# Altium PCB ad7606.PcbDoc
Units mil, origin at the board's own origin, x right, y up, seen from the top; angles counter-clockwise.
Board outline 2465 x 1865 mil, 2 copper layers (Top Layer, Bottom Layer); 26 components, 49 nets, 158 pads, 96 vias.
Unrouted connection lines stored in the file: 11.
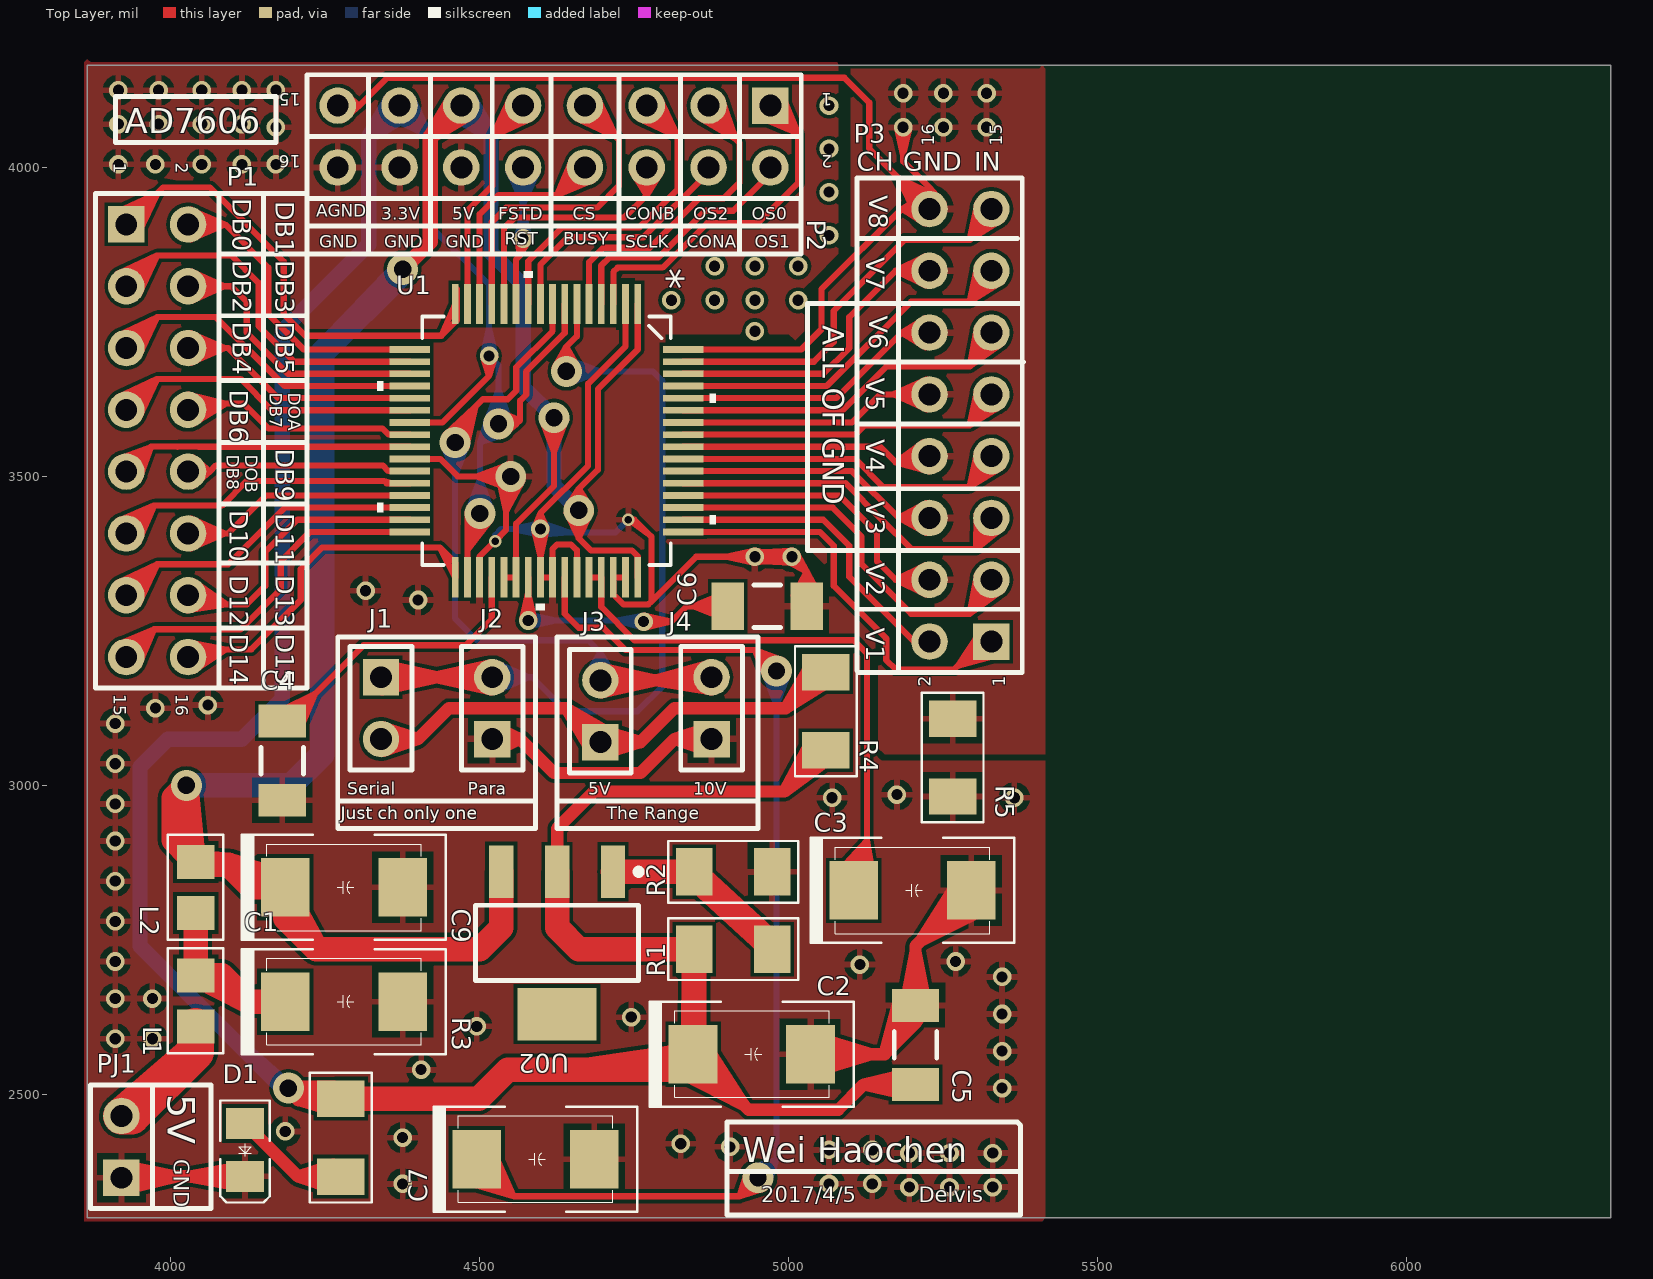
[diagram p0: Top Layer view]
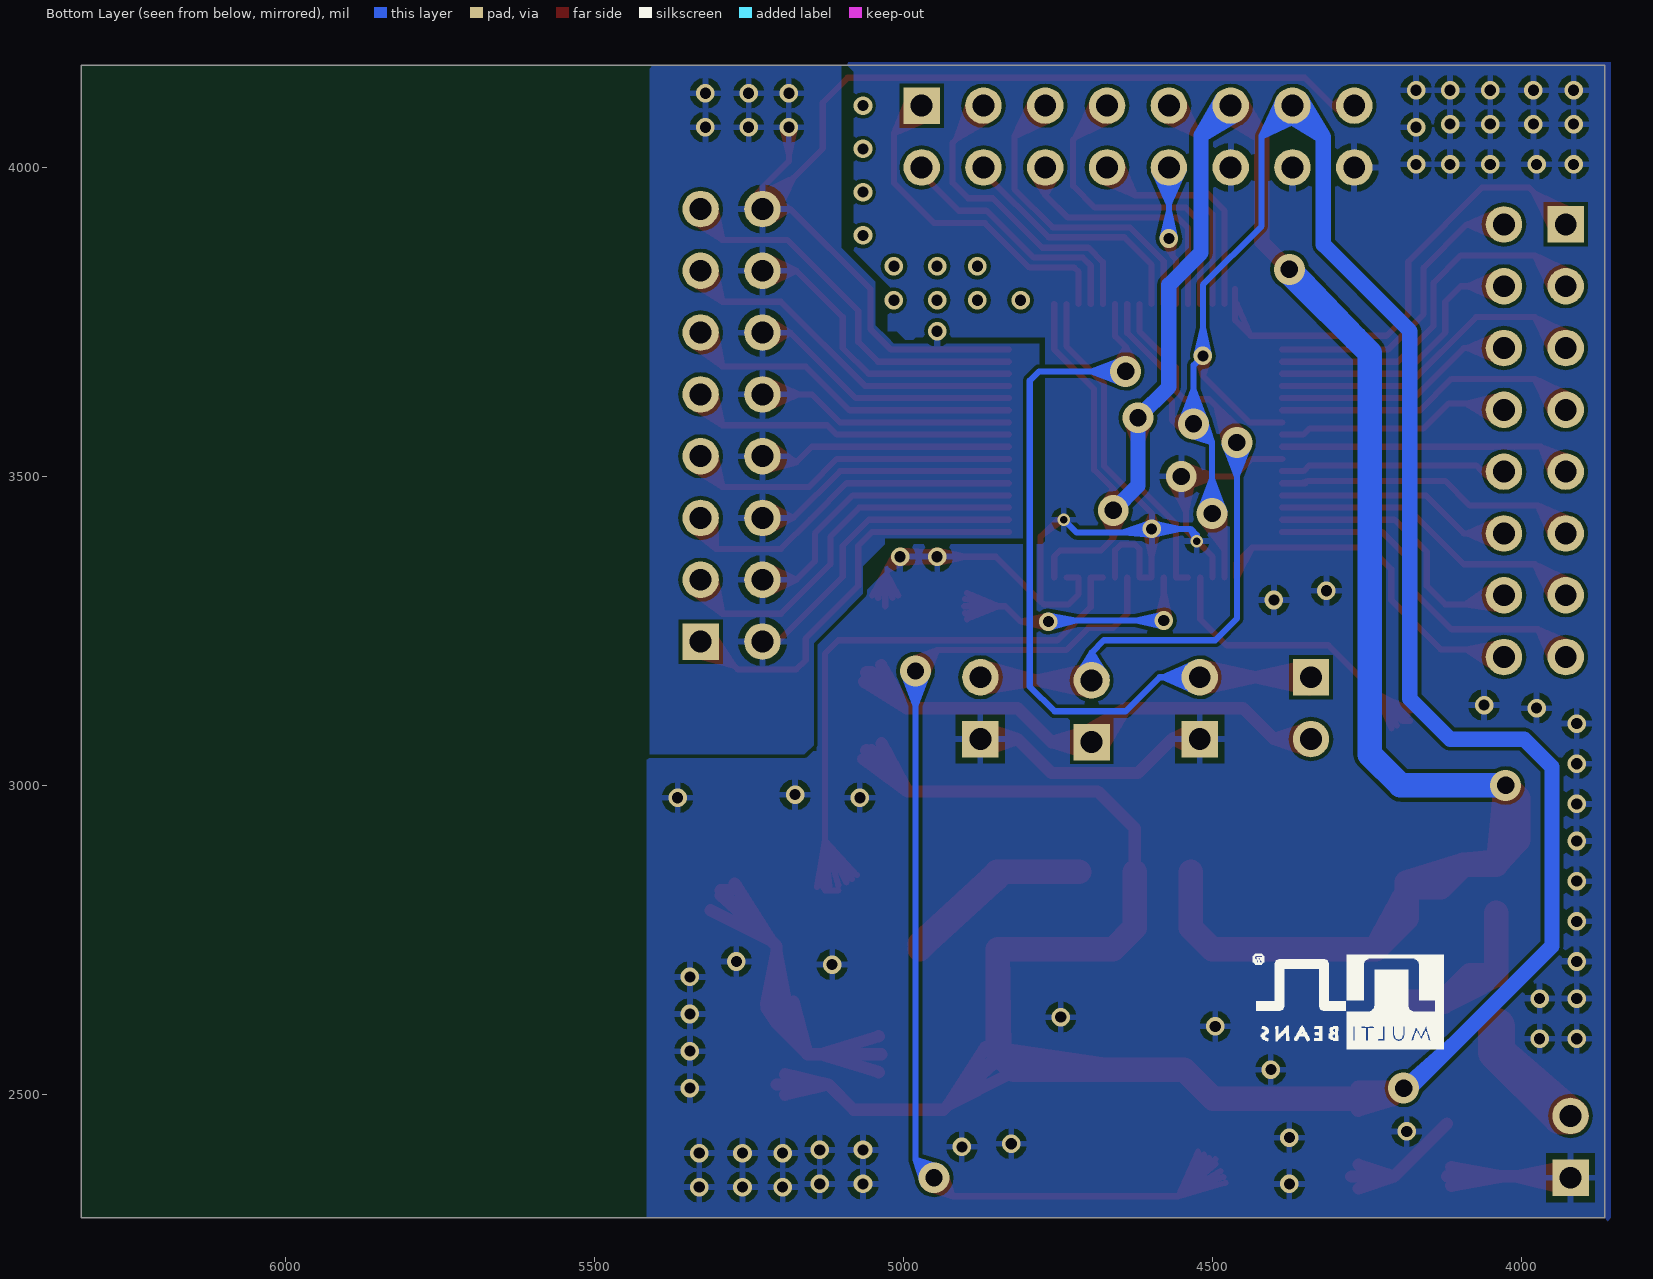
[diagram p1: Bottom Layer view, seen from below]

## Layer stack, top to bottom
Top Layer: signal copper 1.4
Dielectric: dielectric 12.6, FR-4, Dk 4.8
Bottom Layer: signal copper 1.4

## Board outline
3865,4165 3865,2300 6330,2300 6330,4165 3865,4165

## Design rules (kind name [scope] priority, off if disabled: settings)
Clearance [All] p1: gap=6
HoleToHoleClearance [All] p1: gap=6 allowstackedmicrovias=TRUE
PolygonConnect [All] p1: connectstyle=Relief reliefconductorwidth=10 reliefentries=4 polygonreliefangle="90 Angle" airgapwidth=10
RoutingVias [All] p1: holewidth=10 width=20 viastyle="Through Hole" minholewidth=10 minwidth=18 maxholewidth=28 maxwidth=60
SilkToSilkClearance [All] p1: silktosilkclearance=1
SilkToSolderMaskClearance [IsPad] p1: minsilkscreentomaskgap=1 clearancetoexposedcopper=TRUE
SolderMaskExpansion [All] p1: expansion=6
Width [All] p1: maxlimit=80 minlimit=6 preferedwidth=20 toplayer_prefwidth=10 minimp=50.000000 maximp=50.000000 favimp=50.000000
25 further rules are at their usual default settings.

## Components (designator, comment, footprint, x,y, rotation, side; value= is the part's Value field where it differs from the comment)
C1 "Cap Pol1" TCAP_SMD_2312_6032-28_C_M 4280,2650 r0 top
C2 "Cap Pol1" TCAP_SMD_2312_6032-28_C_M 4940,2565 r0 top
C3 "Cap Pol1" TCAP_SMD_2312_6032-28_C_M 5200,2830 r0 top
C4 "Cap" CAP_SMD_1206_3216_M 4180,3040 r270 top
C5 "Cap" CAP_SMD_1206_3216_M 5205,2580 r90 top
C6 "Cap" CAP_SMD_1206_3216_M 4965,3290 r0 top
C7 "Cap Pol1" TCAP_SMD_2312_6032-28_C_M 4590,2395 r0 top
C9 "Cap Pol1" TCAP_SMD_2312_6032-28_C_M 4280,2835 r0 top
D1 "LED0" LED_SMD_0805_2012_M 4120,2410 r90 top
J1 "head2" HDR1X2 4340,3175 r270 top
J2 "head2" HDR1X2 4520,3075 r90 top
J3 "head2" HDR1X2 4695,3070 r90 top
J4 "head2" HDR1X2 4875,3075 r90 top
L1 "Inductor" RES_SMD_0805_2012_M 4040,2651.34 r90 top
L2 "Inductor" RES_SMD_0805_2012_M 4040,2835 r90 top
P1 "MHDR2X8" HDR2X8 3927.74,3907.74 r270 top
P2 "MHDR2X8" HDR2X8 4970,4100 r180 top
P3 "MHDR2X8" HDR2X8 5327.74,3232.74 r90 top
PJ1 "head2" HDR1X2 3920,2365 r90 top
R1 "Res2" RES_SMD_1206_3216_M 4910,2735 r180 top
R2 "Res2" RES_SMD_1206_3216_M 4910,2860 r180 top
R3 "Res2" RES_SMD_1206_3216_M 4275,2430 r270 top
R4 "Res2" RES_SMD_1206_3216_M 5060,3120 r270 top
R5 "Res2" RES_SMD_1206_3216_M 5265,3045 r90 top
U1 "AD7606" AD7606 4607.74,3557.74 r270 top locked
U02 "AMS1117" SOT230P700X180-4N 4625,2745 r270 top

## Footprints (in the part's own frame and the unit in brackets; to place one, negate y for a bottom-side part, rotate by r counter-clockwise, add the part's x,y. Pads: shape width x height; smd on the part's side, far side on the other; paste and mask are expansions set on the pad)
AD7606 [mil]
  rect 65.5x11 smd: 1(-221.25,147.64) 2(-221.25,127.95) 3(-221.25,108.27) 4(-221.25,88.58) 5(-221.25,68.9) 6(-221.25,49.21) 7(-221.25,29.53) 8(-221.25,9.84) 9(-221.25,-9.84) 10(-221.25,-29.53) 11(-221.25,-49.21) 12(-221.25,-68.9) 13(-221.25,-88.58) 14(-221.25,-108.27) 15(-221.25,-127.95) 16(-221.25,-147.64) 33(221.25,-147.64) 34(221.25,-127.95) 35(221.25,-108.27) 36(221.25,-88.58) 37(221.25,-68.9) 38(221.25,-49.21) 39(221.25,-29.53) 40(221.25,-9.84) 41(221.25,9.84) 42(221.25,29.53) 43(221.25,49.21) 44(221.25,68.9) 45(221.25,88.58) 46(221.25,108.27) 47(221.25,127.95) 48(221.25,147.64)
  rect 11x65.5 smd: 17(-147.64,-221.25) 18(-127.95,-221.25) 19(-108.27,-221.25) 20(-88.58,-221.25) 21(-68.9,-221.25) 22(-49.21,-221.25) 23(-29.53,-221.25) 24(-9.84,-221.25) 25(9.84,-221.25) 26(29.53,-221.25) 27(49.21,-221.25) 28(68.9,-221.25) 29(88.58,-221.25) 30(108.27,-221.25) 31(127.95,-221.25) 32(147.64,-221.25) 49(147.64,221.25) 50(127.95,221.25) 51(108.27,221.25) 52(88.58,221.25) 53(68.9,221.25) 54(49.21,221.25) 55(29.53,221.25) 56(9.84,221.25) 57(-9.84,221.25) 58(-29.53,221.25) 59(-49.21,221.25) 60(-68.9,221.25) 61(-88.58,221.25) 62(-108.27,221.25) 63(-127.95,221.25) 64(-147.64,221.25)
  silkscreen extent -274,-274 274,274
CAP_SMD_1206_3216_M [mm] "Chip Capacitor, 2-Leads, Body 3.30x1.70mm, IPC Low Density"
  rect 1.35x1.95 smd: 1(-1.625,0) 2(1.625,0)
  silkscreen extent -0.55,-0.87 0.55,0.87, body extent -1.7,-0.9 1.7,0.9, height 0.8
HDR1X2 [mm] "Connector; Header; 2 Position"
  rect 1.5x1.5 hole 0.9: 1(0,0)
  round 1.5 hole 0.9: 2(2.54,0)
  silkscreen extent -1.27,-1.27 3.81,1.27
HDR2X8 [mm] "Connector; Header; 8x2 Position"
  rect 1.5x1.5 hole 0.9: 1(0,0)
  round 1.5 hole 0.9: 2(0,2.54) 3(2.54,0) 4(2.54,2.54) 5(5.08,0) 6(5.08,2.54) 7(7.62,0) 8(7.62,2.54) 9(10.16,0) 10(10.16,2.54) 11(12.7,0) 12(12.7,2.54) 13(15.24,0) 14(15.24,2.54) 15(17.78,0) 16(17.78,2.54)
  silkscreen extent -1.27,-1.27 19.05,3.81
LED_SMD_0805_2012_M [mm] "LED 2-Leads, Body 2.00x1.35mm, IPC Low Density"
  rect 1.28x1.57 smd: 1(1.085,0) 2(-1.085,0)
  silkscreen extent -2.16,-1.02 2.03,1.02, body extent -1.1,-0.72 1.1,0.72, height 0.8
RES_SMD_0805_2012_M [mm] "Chip Resistor, 2-Leads, Body 2.10x1.37mm, IPC Low Density"
  rect 1.4x1.55 smd: 1(-1.05,0) 2(1.05,0)
  silkscreen extent -2.16,-1.14 2.16,1.14, body extent -1.1,-0.73 1.1,0.73, height 0.8
RES_SMD_1206_3216_M [mm] "Chip Resistor, 2-Leads, Body 3.30x1.70mm, IPC Low Density"
  rect 1.5x1.95 smd: 1(-1.6,0) 2(1.6,0)
  silkscreen extent -2.67,-1.27 2.67,1.27, body extent -1.7,-0.9 1.7,0.9, height 1.4
SOT230P700X180-4N [mm] "SOT223, 4-Leads, Body 6.50x7.00mm (avg), Pitch 2.30mm, IPC Medium Density"
  rect 2.15x1 smd: 1(-2.925,2.3) 2(-2.925,0) 3(-2.925,-2.3)
  rect 2.15x3.25 smd: 4(2.925,0)
  silkscreen extent -3.05,-3.35 1.55,3.48, body extent -1.85,-3.35 1.85,3.35, height 1.8
TCAP_SMD_2312_6032-28_C_M [mm] "Chip Capacitor, 2-Leads, Body 6.00x3.20mm, IPC Low Density"
  rect 2x2.4 smd: 1(-2.413,0) 2(2.413,0)
  silkscreen extent -4.19,-2.16 4.19,2.16, body extent -3.1,-1.7 3.1,1.7, height 2.8

## Part data
C1 C2 C3 C7 C9: "Polarized Capacitor (Radial)"
C4 C5 C6: "Capacitor"
D1: "Typical INFRARED GaAs LED"
P1 P2 P3: "Header, 8-Pin, Dual row"
R1 R2 R3 R4 R5: "Resistor"

## Via types
v1: diameter 30, hole 18, Top Layer to Bottom Layer, 82 vias
v2: diameter 50, hole 28, Top Layer to Bottom Layer, 12 vias
v3: diameter 20, hole 12, Top Layer to Bottom Layer, 2 vias

## Nets (pads, with @x,y where several pads share a name; then routed paths per layer and width w, separated by ;. In a path a pad name is that pad's centre, name@x,y a point inside that pad or via, vN(x,y) a via of type N, cw(c..) or ccw(c..) an arc to the next point about the centre after c; other vN are vias at no path point)
3.3V: C2.1 C5.1 P2.13 R1.2 R3.1 R4.2 U1.7 U1.23 U1.34 U02.2 | length 10003.9
  Top Layer w10: U1.23 4439.64,3587.26 ; U1.23@4413.74,3587.26 4439.64,3587.26 ; U1.34 4479.78,3419.78 v2(4500,3440) 4479.78,3380.67 ; U1.34@4479.78,3363.74 4479.78,3399.24 ; v2@4480.28,3443.35 4479.78,3380.67 ; v2@4490.31,3442.46 4479.78,3380.67 ; v1@4505.12,3693.46 4515,3662.63 ; v2@4509.18,3436.03 4479.78,3380.67 ; v1(4515,3695) 4515,3662.63 ; v2@4517.66,3430.61 4479.78,3380.67 ; v1@4524.88,3693.46 4515,3662.63 ; v2@4529.74,3595 4565,3590.91 ; v2@4532.36,3604.86 4565,3590.91 ; v2@4533.04,3575.47 4565,3590.91 ; v2@4538.75,3567.02 4565,3590.91 ; U1.7@4637.26,3751.74 4637.26,3732.26 ; U1.7 4637.26,3732.26 ; 4439.64,3587.26 4515,3662.63 ; v2(4530,3585) 4559.09,3585 ; v2(4530,3585) 4565,3590.91 ; v2(4530,3585) 4559.09,3585 ; 4559.09,3585 4531.72,3575.15 4559.09,3585 ; 4559.09,3585 4531.72,3594.85 4559.09,3585 ; 4559.09,3585 4536.88,3566.22 4559.09,3585 ; 4559.09,3585 4536.88,3603.78 4559.09,3585 ; 4559.09,3585 4565,3590.91 ; 4565,3590.91 4565,3622.37 4575,3632.37 4575,3670 4637.26,3732.26
  Top Layer w20: U02.2 4625,2930 ; U02.2@4625,2882.8 4625,2930 ; C2.1@4828.39,2532.91 4926.8,2483.2 ; C2.1@4845,2557.13 4926.8,2483.2 ; C2.1 4935,2475 5080,2475 5121.02,2516.02 ; C2.1@4867.42,2576.1 4926.8,2483.2 ; R4.2@5035.07,3068.11 4992.99,2990 ; R4.2@5051.14,3057.01 4992.99,2990 ; R4.2 4992.99,2990 ; R4.2@5064.39,3042.66 4992.99,2990 ; C5.1@5191.29,2499.56 5121.02,2516.02 ; C5.1@5191.29,2532.49 5121.02,2516.02 ; C5.1@5193.19,2516.02 5121.02,2516.02 ; C5.1 5121.02,2516.02 ; 4625,2930 4685,2990 4992.99,2990
  Top Layer w25: v2(4190,2510) 4263.69,2476.14 v2@4207.01,2492.99 ; v2(4190,2510) 4266.14,2492.99 v2@4207.01,2492.99 ; v2(4190,2510) 4263.69,2509.84 v2@4207.01,2492.99 ; v2(4190,2510) R3.1 v2@4207.01,2492.99 ; v2(4190,2510) v2@4207.01,2492.99
  Top Layer w40: R3.1 4497.99,2492.99 4545,2540 4820,2540 C2.1 ; R3.1@4283.86,2492.99 4433.39,2492.99 ; U02.2@4625,2837.52 4625,2770 ; U02.2 4625,2770 ; 4673.96,2540 C2.1 ; 4697.48,2735 R1.2 ; C2.1@4847.01,2576.61 4847.01,2726.14 4845,2572.87 R1.2@4847.01,2732.27 ; 4625,2770 4660,2735 R1.2 ; C2.1 4847.01,2567.01 R1.2
  Bottom Layer w10: P2.13@4355.93,4079.91 4420,4050 ; P2.13@4360.84,4088.73 4420,4050 ; P2.13 4420,4050 ; P2.13@4381.27,4109.16 4420,4050 ; P2.13@4390.09,4114.07 4420,4050 ; v2@4480.33,3443.64 4500,3495 ; v2@4490.04,3440.91 4500,3495 ; v2(4500,3440) 4500,3555 ; v1@4505.06,3696.11 4515,3740 v1@4524.94,3696.11 ; v2@4509.96,3440.91 4500,3495 ; v2@4510.33,3588.64 4530,3640 ; v2@4512.92,3595.41 4500,3555 ; v2@4519.67,3443.64 4500,3495 ; v2@4520.04,3585.91 4530,3640 ; v2@4522.14,3591.19 4500,3555 ; v2@4536.19,3577.14 4500,3555 ; v2@4539.96,3585.91 4530,3640 ; v2@4540.41,3567.92 4500,3555 ; v2@4549.67,3588.64 4530,3640 ; 4420,4050 4420,3905 4515,3810 v1(4515,3695) 4530,3680 v2(4530,3585) ; 4500,3555 v2(4530,3585) ; 4500,3555 v2(4530,3585)
  Bottom Layer w25: 4106.98,2583.02 v2(4190,2510) 4180,2510 3950,2740 3950,3030 3995,3075 4115,3075 4180,3140 4180,3735 4320,3875 4320,4050 ; P2.13@4356.6,4110.5 4320,4050 ; P2.13@4380.5,4086.6 4320,4050 ; 4320,4050 P2.13 4320,4050
5V: C9.1 L2.2 P2.11 U1.1 U1.37 U1.38 U1.48 U02.3 | length 6008.9
  Top Layer w10: U1.38@4558.52,3363.74 4558.52,3399.24 ; v2@4600.33,3591.36 4620,3540 ; v2@4610.04,3594.09 4620,3540 ; v2(4620,3595) 4620,3485 4558.52,3423.52 U1.38 ; v2@4629.96,3594.09 4620,3540 ; v2@4639.67,3591.36 4620,3540 ; v2@4640.5,3440.56 4660,3400 ; v2@4640.85,3450.76 4660,3479.75 ; v2@4650.06,3443.89 4660,3400 ; v2@4650.1,3446.44 4660,3479.75 ; v2@4669.9,3446.44 4660,3479.75 ; v2@4669.94,3443.89 4660,3400 ; v2@4679.15,3450.76 4660,3479.75 ; v2@4679.5,3440.56 4660,3400 ; U1.48 4755.37,3370.61 ; 4755.37,3716.24 U1.1@4755.37,3751.74 ; U1.1 4755.37,3705.37 4691,3641 4691,3510.75 4660,3479.75 ; U1.38 U1.37 U1.38 ; 4660,3400 v2(4660,3445) ; 4660,3400 4679.76,3380.24 4745.75,3380.24 4755.37,3370.61 ; 4660,3400 v2(4660,3445) ; v2(4660,3445) 4660,3479.75 ; 4755.37,3370.61 4755.37,3363.74 4755.37,3370.61
  Top Layer w25: v2(4375,3835) 4420,3880 4420,4050 ; P2.11@4456.6,4110.5 4420,4050 ; P2.11@4480.5,4086.6 4420,4050 ; 4420,4050 P2.11 4420,4050
  Top Layer w40: L2.2@4040,2871.34 4093.66,2871.34 ; L2.2 4005,2911.34 ; L2.2@4042.95,2876.34 4093.66,2871.34 ; C9.1@4185,2842.87 4093.66,2871.34 ; U02.3@4534.45,2837.52 4534.45,2769.45 ; U02.3 4534.45,2769.45 ; 4005,2911.34 v2(4025,3000) ; 4005,2911.34 L2.2@4037.05,2876.34 ; 4005,2911.34 L2.2@4037.05,2876.34 ; 4005,2911.34 4005,2980 ; 4005,2980 L2.2@4037.05,2876.34 ; 4005,2980 v2(4025,3000) ; v2(4025,3000) L2.2@4037.05,2876.34 ; 4093.66,2871.34 4130,2835 ; 4130,2835 C9.1 ; 4130,2835 C9.1 ; 4185,2785 C9.1@4185,2827.13 ; 4185,2785 C9.1@4185,2827.13 ; 4185,2785 4235,2735 ; 4185,2785 C9.1 ; C9.1@4185,2827.13 4235,2735 ; 4235,2735 4500,2735 4534.45,2769.45
  Bottom Layer w25: P2.11@4459.56,4086.55 4518.03,4051.97 ; P2.11 4518.03,4051.97 ; P2.11@4483.45,4110.44 4518.03,4051.97 ; 4518.03,4051.97 4518.03,3861.97 4570,3810 4570,3645 ; 4570,3645 v2(4620,3595) ; 4570,3645 v2(4620,3595) ; 4620,3485 v2(4660,3445) 4620,3485 ; 4620,3485 v2(4620,3595)
  Bottom Layer w40: v2(4025,3000) 4195,3000 4245,3050 4245,3700 4375,3830 v2(4375,3835) 4268.02,3723.02
AGND: P2.15 P3.2 P3.4 P3.6 P3.8 P3.10 P3.12 P3.14 P3.16 R5.2 U1.50 U1.52 U1.54 U1.56 U1.58 U1.60 U1.62 U1.64 | length 7702.3
  Top Layer w10: P2.15 4305,4100 ; P2.15@4273.02,4085.79 4305,4100 ; P2.15@4273.02,4114.21 4305,4100 ; P2.15@4278.59,4077.03 4305,4100 ; P2.15@4278.59,4122.97 4305,4100 ; U1.50 5055.69,3429.78 5097.74,3387.74 5097.74,3337.74 5202.74,3232.74 P3.2 ; U1.52 5081.32,3469.15 5142.74,3407.74 5142.74,3362.74 5172.74,3332.74 ; U1.54 5101.95,3508.52 5177.74,3432.74 ; U1.56 5147.58,3547.89 5172.74,3522.74 ; U1.58 5102.26,3587.26 5147.74,3632.74 P3.10 5168.21,3632.74 ; U1.60 5076.63,3626.63 5182.74,3732.74 ; U1.62 5056,3666 5097.74,3707.74 5097.74,3757.74 5172.74,3832.74 ; U1.64 5020.37,3705.37 5052.74,3737.74 5052.74,3802.74 5182.74,3932.74 ; U1.50@4856.24,3429.78 4891.74,3429.78 ; U1.52@4856.24,3469.15 4891.74,3469.15 ; U1.54@4856.24,3508.52 4891.74,3508.52 ; U1.56@4856.24,3547.89 4891.74,3547.89 ; U1.58@4856.24,3587.26 4891.74,3587.26 ; U1.60@4856.24,3626.63 4891.74,3626.63 ; U1.62@4856.24,3666 4891.74,3666 ; U1.64@4856.24,3705.37 4891.74,3705.37 ; v1@5175.06,4063.89 5185,4020 v1@5194.94,4063.89 ; v1(5185,4065) 5185,4010 5227.74,3967.26 ; P3.16@5204.81,3941.45 5227.74,3967.26 ; P3.16@5207.68,3918.61 5177,3983.48 ; P3.16@5213.53,3935.79 5227.74,3967.26 ; P3.16@5216.48,3923.56 5177,3983.48 ; P3.8@5218.16,3555.32 5172.74,3522.74 ; P3.12@5221.05,3709.14 5182.74,3732.74 ; P3.12@5221.05,3756.34 5182.74,3732.74 ; P3.16@5221.05,3909.14 5182.74,3932.74 ; P3.16@5221.05,3956.34 5182.74,3932.74 ; P3.6@5221.72,3408.96 5177.74,3432.74 ; P3.6@5221.72,3456.51 5177.74,3432.74 ; P3.4@5222.27,3308.83 5172.74,3332.74 ; P3.4@5222.27,3356.65 5172.74,3332.74 ; P3.14@5222.27,3808.83 5172.74,3832.74 ; P3.14@5222.27,3856.65 5172.74,3832.74 ; P3.10@5222.68,3608.73 5168.21,3632.74 ; P3.10@5222.68,3656.74 5168.21,3632.74 ; P3.8@5223.3,3546.57 5172.74,3522.74 ; P3.12@5225.39,3718.4 5182.74,3732.74 ; P3.12@5225.39,3747.07 5182.74,3732.74 ; P3.16@5225.39,3918.4 5182.74,3932.74 ; P3.16@5225.39,3947.07 5182.74,3932.74 ; P3.6@5225.63,3418.36 5177.74,3432.74 ; P3.6@5225.63,3447.11 5177.74,3432.74 ; P3.4@5225.82,3318.34 5172.74,3332.74 ; P3.4@5225.82,3347.14 5172.74,3332.74 ; P3.14@5225.82,3818.34 5172.74,3832.74 ; P3.14@5225.82,3847.14 5172.74,3832.74 ; P3.10@5225.96,3618.32 5168.21,3632.74 ; P3.10@5225.96,3647.16 5168.21,3632.74 ; P3.8@5226.72,3508.23 5172.74,3522.74 ; P3.8@5228.46,3518.23 5172.74,3522.74 ; P3.16@5236.92,3944 5177,3983.48 ; P3.16@5241.86,3952.79 5177,3983.48 ; P3.16@5241.94,3935.79 5227.74,3967.26 ; P3.16@5250.66,3941.45 5227.74,3967.26 ; 4305,4100 4350,4145 5090,4145 5130,4105 5130,4030.47 P3.16 ; 5172.74,3332.74 P3.4 5172.74,3332.74 ; 5172.74,3522.74 P3.8 5217.74,3522.74 5172.74,3522.74 ; 5172.74,3832.74 P3.14 5172.74,3832.74 ; 5177.74,3432.74 P3.6 5177.74,3432.74 ; 5182.74,3732.74 P3.12 5182.74,3732.74 ; 5182.74,3932.74 P3.16 ; P3.16 5227.74,3967.26
  other v1: 4945,3735 4810,3785 4880,3785 4945,3785 5015,3785 4880,3840 4945,3840 5015,3840 5065,3890 5065,3960 5065,4030 5250,4065 5320,4065 5065,4100 5185,4120 5250,4120 5320,4120
BUSY: P2.8 U1.14 | length 637.4
  Top Layer w10: U1.14 4499.47,3924.47 4530,3955 4625,3955 ; U1.14@4499.47,3806.24 4499.47,3841.74 ; P2.8@4649.64,4013.68 4625,3955 ; P2.8@4658.62,4009.03 4625,3955 ; P2.8 4625,3955 ; P2.8@4679.03,3988.62 4625,3955 ; P2.8@4683.68,3979.64 4625,3955
CONVST_A: P2.4 U1.9 | length 441.1
  Top Layer w10: U1.9 4597.89,3842.89 4642,3887 4764.63,3887 4870,3992.37 P2.4 ; U1.9@4597.89,3806.24 4597.89,3841.74
CONVST_B: P2.5 U1.10 | length 833.4
  Top Layer w10: U1.10 4578.21,3848.21 4633,3903 4758,3903 4820,3965 4820,4050 ; U1.10@4578.21,3806.24 4578.21,3841.74 ; P2.5@4755.93,4079.91 4820,4050 ; P2.5@4760.84,4088.73 4820,4050 ; P2.5 4820,4050 ; P2.5@4781.27,4109.16 4820,4050 ; P2.5@4790.09,4114.07 4820,4050
CS: P2.7 U1.13 | length 837.9
  Top Layer w10: U1.13 4519.15,3911.53 4542.63,3935 4690,3935 4725,3970 4725,4045 P2.7 ; U1.13@4519.15,3806.24 4519.15,3841.74 ; P2.7@4655.88,4079.95 4720.74,4049.26 ; P2.7@4660.82,4088.74 4720.74,4049.26 ; P2.7@4681.26,4109.18 4720.74,4049.26 ; P2.7@4690.05,4114.12 4720.74,4049.26
DB0: P1.1 U1.16 | length 1112.4
  Top Layer w10: P1.1@3913.61,3927.79 3978.48,3958.48 ; P1.1@3918.56,3919 3978.48,3958.48 ; P1.1 3987.74,3967.74 4062.74,3967.74 4182.74,3847.74 4182.74,3762.74 4217.74,3727.74 4437.74,3727.74 ; P1.1@3939,3898.56 3978.48,3958.48 ; P1.1@3947.79,3893.61 3978.48,3958.48 ; U1.16 4437.74,3727.74 ; U1.16@4462.74,3802.74 4462.74,3752.74 4437.74,3727.74
DB1: P1.2 U1.17 | length 760.1
  Top Layer w10: P1.2 4087.74,3907.74 4157.74,3837.74 4157.74,3762.74 4215.1,3705.37 U1.17 ; P1.2@4029.51,3893.32 4087.26,3907.74 ; P1.2@4029.51,3922.16 4087.26,3907.74 ; P1.2@4032.79,3883.73 4087.26,3907.74 ; P1.2@4032.79,3931.74 4087.26,3907.74 ; 4323.74,3705.37 U1.17@4359.24,3705.37
DB2: P1.3 U1.18 | length 910.1
  Top Layer w10: P1.3@3913.66,3827.82 3977.74,3857.74 ; P1.3@3918.57,3819.01 3977.74,3857.74 ; P1.3 3977.74,3857.74 ; P1.3@3939.01,3798.57 3977.74,3857.74 ; P1.3@3947.82,3793.66 3977.74,3857.74 ; 4323.74,3685.69 U1.18@4359.24,3685.69 ; U1.18 4199.78,3685.69 4141.74,3743.74 4141.74,3813.74 4097.74,3857.74 3977.74,3857.74
DB3: P1.4 U1.19 | length 720.4
  Top Layer w10: P1.4 4097.74,3807.74 4122.74,3782.74 4122.74,3732.74 4189.47,3666 U1.19 ; P1.4@4029.51,3793.32 4087.26,3807.74 ; P1.4@4029.51,3822.16 4087.26,3807.74 ; P1.4@4032.79,3783.73 4087.26,3807.74 ; P1.4@4032.79,3831.74 4087.26,3807.74 ; 4323.74,3666 U1.19@4359.24,3666
DB4: P1.5 U1.20 | length 844
  Top Layer w10: P1.5@3913.66,3727.82 3977.74,3757.74 ; P1.5@3918.57,3719.01 3977.74,3757.74 ; P1.5 3977.74,3757.74 ; P1.5@3939.01,3698.57 3977.74,3757.74 ; P1.5@3947.82,3693.66 3977.74,3757.74 ; 4323.74,3646.32 U1.20@4359.24,3646.32 ; U1.20 4184.15,3646.32 4072.74,3757.74 3977.74,3757.74
DB5: P1.6 U1.21 | length 666
  Top Layer w10: P1.6 4092.74,3707.74 4173.84,3626.63 U1.21 ; P1.6@4029.51,3693.32 4087.26,3707.74 ; P1.6@4029.51,3722.16 4087.26,3707.74 ; P1.6@4032.79,3683.73 4087.26,3707.74 ; P1.6@4032.79,3731.74 4087.26,3707.74 ; 4323.74,3626.63 U1.21@4359.24,3626.63
DB6: P1.7 U1.22 | length 818.8
  Top Layer w10: P1.7@3913.66,3627.82 3977.74,3657.74 ; P1.7@3918.57,3619.01 3977.74,3657.74 ; P1.7 3977.74,3657.74 ; P1.7@3939.01,3598.57 3977.74,3657.74 ; P1.7@3947.82,3593.66 3977.74,3657.74 ; 4323.74,3606.95 U1.22@4359.24,3606.95 ; U1.22 4163.52,3606.95 4112.74,3657.74 3977.74,3657.74
DB7: P1.8 U1.24 | length 704.8
  Top Layer w10: P1.8@4027.08,3622.25 4088.39,3617.74 ; P1.8@4028.65,3632.25 4088.39,3617.74 ; P1.8@4031.78,3593.78 4088.39,3617.74 ; P1.8@4036.47,3584.82 4088.39,3617.74 ; U1.24 4352.36,3567.58 ; 4088.39,3617.74 P1.8 4037.74,3617.74 4117.74,3617.74 4157.74,3577.74 4342.21,3577.74 4352.36,3567.58 ; 4352.36,3567.58 4359.24,3567.58 4352.36,3567.58
DB8: P1.9 U1.25 | length 738.4
  Top Layer w10: P1.9@3914.55,3528.42 3967.89,3547.89 ; P1.9@3918.86,3519.24 3967.89,3547.89 ; P1.9 3967.89,3547.89 ; P1.9@3939.24,3498.86 3967.89,3547.89 ; P1.9@3948.42,3494.55 3967.89,3547.89 ; 3968.26,3548.26 4010.95,3548.26 ; 4010.58,3547.89 4010.95,3548.26 ; 4323.74,3547.89 U1.25@4359.24,3547.89 ; U1.25 4044.89,3547.89 4044.52,3548.26 4010.95,3548.26
DB9: P1.10 U1.27 | length 522.4
  Top Layer w10: P1.10@4028.52,3508.52 P1.10 4062.74,3507.74 ; P1.10@4030.75,3493.53 4062.74,3507.74 ; P1.10@4030.75,3521.95 4062.74,3507.74 ; P1.10@4036.33,3484.76 4062.74,3507.74 ; P1.10@4036.33,3530.71 4062.74,3507.74 ; U1.27 4351.95,3508.52 ; 4062.74,3507.74 4072.74,3517.74 4342.74,3517.74 4351.95,3508.52 ; 4351.95,3508.52 4359.24,3508.52 4351.95,3508.52
DB10: P1.11 U1.28 | length 785.2
  Top Layer w10: P1.11@3914.06,3428.1 3972.74,3452.74 ; P1.11@3918.7,3419.11 3972.74,3452.74 ; P1.11 3972.74,3452.74 ; P1.11@3939.11,3398.7 3972.74,3452.74 ; P1.11@3948.1,3394.06 3972.74,3452.74 ; U1.28 4349.01,3488.84 ; 3972.74,3452.74 4082.74,3452.74 4122.74,3492.74 4345.11,3492.74 ; 4345.11,3492.74 U1.28@4359.24,3488.84 ; 4345.11,3492.74 4349.01,3488.84 ; 4349.01,3488.84 U1.28@4359.24,3488.84 ; 4349.01,3488.84 U1.28@4359.24,3488.84
DB11: P1.12 U1.29 | length 657.8
  Top Layer w10: P1.12 4092.74,3407.74 4154.15,3469.15 U1.29 ; P1.12@4029.51,3393.32 4087.26,3407.74 ; P1.12@4029.51,3422.16 4087.26,3407.74 ; P1.12@4032.79,3383.73 4087.26,3407.74 ; P1.12@4032.79,3431.74 4087.26,3407.74 ; 4323.74,3469.15 U1.29@4359.24,3469.15
DB12: P1.13 U1.30 | length 835.8
  Top Layer w10: P1.13@3913.66,3327.82 3977.74,3357.74 ; P1.13@3918.57,3319.01 3977.74,3357.74 ; P1.13 3977.74,3357.74 ; P1.13@3939.01,3298.57 3977.74,3357.74 ; P1.13@3947.82,3293.66 3977.74,3357.74 ; 4323.74,3449.47 U1.30@4359.24,3449.47 ; U1.30 4184.47,3449.47 4092.74,3357.74 3977.74,3357.74
DB13: P1.14 U1.31 | length 812.4
  Top Layer w10: P1.14@4025.97,3293.32 4090.57,3292.74 ; P1.14@4026.67,3283.23 4090.57,3292.74 ; P1.14@4032.68,3321.4 4090.57,3292.74 ; P1.14@4037.86,3330.08 4090.57,3292.74 ; 4323.74,3429.78 U1.31@4359.24,3429.78 ; U1.31 4204.78,3429.78 4152.74,3377.74 4152.74,3322.74 4122.74,3292.74 4042.74,3292.74 P1.14 4090.57,3292.74
DB14: P1.15 U1.32 | length 859
  Top Layer w10: P1.15@3914.06,3228.1 3972.74,3252.74 ; P1.15@3918.7,3219.11 3972.74,3252.74 ; P1.15 3972.74,3252.74 ; P1.15@3939.11,3198.7 3972.74,3252.74 ; P1.15@3948.1,3194.06 3972.74,3252.74 ; 4323.74,3410.1 U1.32@4359.24,3410.1 ; U1.32 4225.1,3410.1 4177.74,3362.74 4177.74,3317.74 4112.74,3252.74 3972.74,3252.74
DB15: P1.16 U1.33 | length 937.6
  Top Layer w10: P1.16@4026.57,3222.22 4089.34,3220 ; P1.16@4027.74,3232.26 4089.34,3220 ; P1.16@4032.2,3193.91 4089.34,3220 ; P1.16@4037.13,3185.08 4089.34,3220 ; 4089.34,3220 P1.16 4040,3220 4130,3220 4210,3300 4210,3350 4245,3385 4435,3385 ; 4435,3385 U1.33 4460.1,3359.9 4435,3385
FIRSTDATA: P2.9 U1.15 | length 676.7
  Top Layer w10: U1.15 4479.78,3929.78 4520,3970 4520,4050 ; U1.15@4479.78,3806.24 4479.78,3841.74 ; P2.9@4549.91,4114.07 4520,4050 ; P2.9@4558.73,4109.16 4520,4050 ; P2.9 4520,4050 ; P2.9@4579.16,4088.73 4520,4050 ; P2.9@4584.07,4079.91 4520,4050
GND: C1.2 C2.2 C3.2 C4.2 C5.2 C6.2 C7.2 C9.2 D1.2 J2.1 J4.1 P2.12 P2.14 P2.16 PJ1.1 R2.1 R5.1 U1.2 U1.26 U1.35 U1.40 U1.41 U1.43 U1.46 U1.47 | length 7130.9
  Top Layer w10: U1.26 4435.88,3528.21 ; U1.26@4413.74,3528.21 4435.88,3528.21 ; U1.35 4499.47,3370.61 ; v3(4525,3395) 4542.52,3413.66 ; v2@4530.02,3499.09 4542.52,3444.21 ; v2@4540.01,3500.44 4542.52,3444.21 ; v2@4546.36,3480.33 4495,3500 ; v2@4546.36,3519.67 4495,3500 ; v2@4549.09,3490.04 4495,3500 ; v2@4549.09,3509.96 4495,3500 ; v2@4559.75,3497.8 4542.52,3444.21 ; v2@4569.04,3493.86 4542.52,3444.21 ; v1@4588.09,3416.98 4597.89,3440.27 ; v1@4588.41,3411.83 4597.89,3399.24 ; U1.40@4597.89,3363.74 4597.89,3399.24 ; v1@4607.38,3411.83 4597.89,3399.24 ; v1@4607.7,3416.98 4597.89,3440.27 ; U1.41@4617.58,3363.74 4617.58,3382.58 ; U1.43 4656.95,3380.42 ; U1.43@4656.95,3363.74 4656.95,3380.42 ; U1.46@4716,3309.24 4732.26,3292.74 ; 4735.69,3716.24 U1.2@4735.69,3751.74 ; U1.2 4735.69,3710.69 4675,3650 4675,3517.37 4597.89,3440.27 ; 4776.4,3403.6 v3(4740,3430) 4750,3430 4777.5,3402.5 4777.5,3297.5 ; v1@4943.89,3360.06 4900,3370 v1@4943.89,3379.94 ; v1@4946.11,3360.06 4990,3370 v1@4946.11,3379.94 ; v1@4999.05,3361.96 5028.98,3346.02 ; v1@5002.44,3360.33 4958.27,3377.18 ; v1@5002.44,3379.67 4958.27,3362.82 ; v1@5003.89,3360.06 4960,3370 v1@5003.89,3379.94 ; v1@5005.47,3360.01 4958.27,3362.82 ; v1@5005.47,3379.99 4958.27,3377.18 ; C6.2@5008.05,3307.07 5028.98,3346.02 ; v1@5013.04,3375.95 5028.98,3346.02 ; C6.2@5017.5,3303.33 5028.98,3346.02 ; C6.2 5028.98,3346.02 ; C6.2@5028.98,3301.81 5028.98,3346.02 ; C6.2@5040.45,3303.33 5028.98,3346.02 ; C6.2@5049.9,3307.07 5028.98,3346.02 ; 4435.88,3528.21 4464.09,3500 v2(4550,3500) ; 4495,3500 v2(4550,3500) ; 4499.47,3370.61 4499.47,3363.74 4499.47,3370.61 ; 4499.47,3370.61 4542.52,3413.66 ; 4542.52,3413.66 4542.52,3492.52 v2(4550,3500) ; 4542.52,3444.21 v2(4550,3500) ; U1.40 U1.41 ; U1.40 v1(4597.89,3415) ; U1.40 U1.41 ; 4597.89,3370 v1(4597.89,3415) ; 4597.89,3370 4587.96,3413.89 4597.89,3370 ; 4597.89,3370 4607.83,3413.89 4597.89,3370 ; 4597.89,3370 v1(4597.89,3415) ; 4597.89,3399.24 v1(4597.89,3415) ; v1(4597.89,3415) 4597.89,3440.27 ; U1.41 4617.58,3382.58 ; 4617.58,3382.58 4625,3390 4647.37,3390 4656.95,3380.42 ; U1.46 U1.47 U1.46 ; U1.46 4716,3309 4732.26,3292.74 ; 4732.26,3292.74 4772.74,3292.74 4777.5,3297.5 ; 4777.5,3297.5 4850,3370 v1(4945,3370) v1(5005,3370) ; 4958.27,3362.82 v1(5005,3370) ; 4958.27,3377.18 v1(5005,3370) ; v1(5005,3370) 5028.98,3346.02
  Top Layer w20: PJ1.1 4009.6,2367.28 ; PJ1.1@3921.63,2384.46 4009.6,2367.28 ; PJ1.1@3922.28,2367.28 D1.2 ; PJ1.1@3922.62,2345.65 4009.6,2367.28 ; D1.2@4112.94,2352.15 4029.09,2367.28 ; D1.2@4112.94,2382.42 4029.09,2367.28 ; D1.2@4114.29,2367.28 4029.09,2367.28 ; J2.1 4565,3075 ; J2.1@4524.24,3055.94 4565,3075 ; J2.1@4524.24,3094.06 4565,3075 ; J4.1@4871.82,3055.73 4815,3075 ; J4.1@4871.82,3094.27 4815,3075 ; C2.2 5155,2565 ; C2.2@5039.34,2535.95 5134.37,2565 C2.2@5039.34,2594.05 ; C5.2@5177.65,2649.75 5155,2565 ; C5.2@5188.5,2645.56 5205,2730.55 C5.2@5221.5,2645.56 ; C5.2@5193.19,2643.98 5155,2565 ; C5.2@5207.36,2635.38 5155,2565 ; C3.2@5272.58,2841.1 5213.2,2748.2 ; C3.2@5280,2830 C3.2 5205,2740 C5.2 ; C3.2@5295,2822.13 5213.2,2748.2 ; C3.2@5311.61,2797.91 5213.2,2748.2 ; 4565,3075 4620,3020 4760,3020 4815,3075 ; 4815,3075 J4.1 4815,3075 ; 5155,2565 5205,2615 ; 5205,2615 C5.2 ; 5205,2615 5189.12,2639.24 5205,2615 ; 5205,2615 5220.88,2639.24 5205,2615 ; 5205,2615 C5.2
  Bottom Layer w10: v1@4596.78,3405.06 4552.89,3415 v1@4596.78,3424.94 ; v1@4597.68,3405 4644.32,3409 ; v1@4600.23,3424.72 4644.32,3409 ; v3(4740,3430) 4719,3409 4603.89,3409 v1(4597.89,3415) ; 4535,3415 v3(4525,3395) 4525,3405 4535,3415 ; 4535,3415 v1(4597.89,3415) ; v1(4597.89,3415) 4644.32,3409
  other v1: 5195,2350 5260,2350 5330,2350 4375,2355 5065,2355 5135,2355 5195,2405 5260,2405 5330,2405 5065,2410 5135,2410 4905,2415 4825,2420 4375,2430 4185,2440 5345,2510 4405,2540 5345,2570 3910,2590 3970,2590 4495,2610 4745,2625 5345,2630 3910,2655 3970,2655 5345,2690 5115,2710 3910,2715 5270,2715 3910,2780 3910,2845 3910,2910 3910,2970 5070,2980 5365,2980 5175,2985 3910,3035 3910,3100 3975,3125 4060,3130 4400,3300 4315,3315 3915,4005 3975,4005 4050,4005 4115,4005 4170,4005 4170,4065 3915,4070 3980,4070 4050,4070 4115,4070 3915,4125 3980,4125 4050,4125 4115,4125 4170,4125
NetC1_1: C1.1 L1.2 L2.1 | length 434.9
  Top Layer w40: L2.1 L1.2 4082.32,2692.68 ; C1.1 4125,2650 ; L1.2@4042.95,2692.68 4082.32,2692.68 ; L1.2@4042.95,2692.68 4125,2650 ; L1.2@4042.95,2692.68 4082.32,2692.68 ; 4082.32,2692.68 4125,2650
NetC3_1: C3.1 U1.44 U1.45 | length 1506.5
  Top Layer w10: U1.45@4696.32,3309.24 4696.32,3288.68 ; C3.1@5075.07,2854.77 5126.46,2910.85 ; C3.1@5083.02,2848.41 5126.46,2910.85 ; C3.1@5091.66,2843.21 5126.46,2910.85 ; C3.1 5126.46,2830 5126.46,3213.54 5105,3235 4750,3235 4696.32,3288.68 ; C3.1@5105,2837.87 5126.46,2910.85 ; C3.1@5119.11,2835.14 5126.46,2910.85 ; C3.1@5129.18,2834.83 5126.46,2910.85 ; C3.1@5139.31,2835.88 5126.46,2910.85 ; 4696.32,3288.68 U1.45 ; U1.45 U1.44 U1.45
NetC4_1: C4.1 U1.36 | length 815.5
  Top Layer w10: C4.1@4178.92,3121.27 4233.51,3148.51 ; C4.1 4188.98,3103.98 4311.77,3226.77 4476.77,3226.77 4519.15,3269.15 U1.36 ; C4.1@4184.15,3112.65 4233.51,3148.51 ; C4.1@4191.81,3103.98 4233.51,3148.51 ; C4.1@4200.97,3096.9 4233.51,3148.51 ; C4.1@4209.92,3092.25 4233.51,3148.51 ; 4519.15,3273.74 U1.36@4519.15,3309.24
NetC6_1: C6.1 U1.39 | length 1254.7
  Top Layer w10: v1@4568.27,3267.9 4578.21,3311.79 v1@4588.15,3267.9 ; v1@4568.28,3267.97 U1.39@4578.21,3309.24 ; v1@4578.21,3273.74 U1.39@4578.21,3309.24 ; U1.39 v1(4578.21,3266.79) U1.39@4578.21,3309.24 ; v1@4588.14,3267.97 U1.39@4578.21,3309.24 ; v1(4765,3265) 4810,3265 ; v1@4766.11,3255.06 4810,3265 ; v1@4766.11,3274.94 4810,3265 ; C6.1@4896.91,3268.82 4844.45,3290 ; C6.1@4896.91,3311.18 4844.45,3290 ; C6.1@4899.84,3278.49 4844.45,3290 ; C6.1@4899.84,3301.51 4844.45,3290 ; 4810,3265 4835,3290 C6.1 4844.45,3290
  Bottom Layer w10: v1(4578.21,3266.79) 4763.21,3266.79 v1(4765,3265) 4719.9,3266.79 ; v1@4579.32,3256.85 4623.21,3266.79 v1@4579.32,3276.73 ; v1@4763.5,3255.11 4719.9,3266.79 ; v1@4764.29,3274.97 4719.9,3266.79
NetC7_1: C7.1 U1.42 | length 3155.9
  Top Layer w10: C7.1@4478.6,2356.92 4555,2335 ; C7.1@4482.03,2366.5 4555,2335 ; C7.1@4486.59,2375.47 4555,2335 ; C7.1@4495,2387.13 4555,2335 ; C7.1 4555,2335 ; C7.1@4505.37,2397.08 4555,2335 ; C7.1@4513.61,2402.86 4555,2335 ; C7.1@4522.62,2407.58 4555,2335 ; U1.42@4637.26,3309.24 4637.26,3277.74 ; U1.42 4637.26,3277.74 ; v2@4932.92,2375.41 4920,2335 ; v2@4942.14,2371.19 4920,2335 ; v2(4950,2365) 4920,2335 ; v2@4956.19,2357.14 4920,2335 ; v2@4960.41,2347.92 4920,2335 ; v2@4963.42,3173.81 4945,3219 ; v2@4972.33,3178.58 4945,3219 ; v2@4986.2,3192.85 4945,3219 ; v2@4990.7,3201.9 4945,3219 ; 4555,2335 4920,2335 ; 4637.26,3277.74 4660,3255 4700,3255 4736,3219 4945,3219 ; 4945,3219 v2(4980,3185) 4979,3185 4945,3219
  Bottom Layer w10: v2@4939.59,2382.08 4980,2395 ; v2@4943.81,2372.86 4980,2395 ; v2(4950,2365) 4980,2395 ; v2@4957.86,2358.81 4980,2395 ; v2@4960.33,3181.36 4980,3130 ; v2@4967.08,2354.59 4980,2395 ; v2@4970.04,3184.09 4980,3130 ; v2(4980,3185) 4980,2395 ; v2@4989.96,3184.09 4980,3130 ; v2@4999.67,3181.36 4980,3130
NetD1_1: D1.1 R3.2 | length 371.8
  Top Layer w20: D1.1 4205.71,2367.01 ; R3.2@4262.99,2347.74 4205.71,2367.01 ; R3.2@4262.99,2386.28 4205.71,2367.01 ; R3.2@4266.14,2367.01 4205.71,2367.01 ; R3.2 4205.71,2367.01
NetJ1_1: J1.1 J2.2 U1.6 | length 2267.6
  Top Layer w10: v2@4620.64,3675 4640,3710 ; v2@4630.08,3671.25 4640,3710 ; v2(4640,3670) 4640,3710 ; v2@4649.92,3671.25 4640,3710 ; U1.6@4656.95,3751.74 4656.95,3726.95 ; U1.6 4656.95,3726.95 ; v2@4659.36,3675 4640,3710 ; 4640,3710 4656.95,3726.95
  Top Layer w20: J1.1 J2.2 ; J1.1@4342.13,3155.59 4429.53,3175 J1.1@4342.13,3194.41 ; J2.2@4517.87,3155.59 4430.47,3175 J2.2@4517.87,3194.41
  Bottom Layer w10: J2.2 4585,3175 4640,3120 4755,3120 4795,3160 4795,3655 4780,3670 v2(4640,3670) ; J2.2@4521.77,3160.58 4579.53,3175 ; J2.2@4521.77,3189.42 4579.53,3175 ; J2.2@4525.05,3151 4579.53,3175 ; J2.2@4525.05,3199 4579.53,3175 ; v2@4640.91,3660.04 4695,3670 ; v2@4640.91,3679.96 4695,3670 ; v2@4643.64,3650.33 4695,3670 ; v2@4643.64,3689.67 4695,3670
NetJ1_2: J1.2 J3.1 R4.1 | length 1535.9
  Top Layer w20: J1.2 4400,3075 ; J1.2@4343.18,3055.73 4400,3075 ; J1.2@4343.18,3094.27 4400,3075 ; J3.1@4679.57,3058.03 4640,3125 ; J3.1@4697.93,3050.69 4760,3070 ; J3.1@4697.93,3089.31 4760,3070 ; J3.1@4706.97,3085.43 4640,3125 ; R4.1@5035.58,3194.79 4994.94,3125 ; R4.1@5051.14,3182.99 4994.94,3125 ; R4.1 5052.93,3182.99 4994.94,3125 ; R4.1@5063.42,3167.81 4994.94,3125 ; 4400,3075 4450,3125 4640,3125 ; 4640,3125 J3.1 ; 4640,3125 J3.1 ; J3.1 4760,3070 ; 4760,3070 4815,3125 4994.94,3125
NetJ3_2: J3.2 J4.2 U1.8 | length 2279
  Top Layer w10: v2@4444.28,3567.37 4492.58,3612.58 ; v2@4451.69,3560.57 4492.58,3612.58 ; v2@4469.05,3550.75 4492.58,3612.58 ; v2@4478.7,3547.9 4492.58,3612.58 ; U1.8@4617.58,3751.74 4617.58,3735.21 ; U1.8 4617.58,3735.21 ; 4492.58,3612.58 v2(4460,3555) 4460,3580 4505,3625 4545,3625 4559,3639 4559,3676.63 4617.58,3735.21
  Top Layer w20: J3.2 4870,3170 J4.2 4785.12,3170 ; J3.2@4697.13,3150.59 4784.53,3170 J3.2@4697.13,3189.41 ; J4.2@4871.81,3194.26 4785.12,3170 ; J4.2@4873.96,3155.5 4785.12,3170
  Bottom Layer w10: v2@4440.33,3551.36 4460,3500 ; v2@4450.04,3554.09 4460,3500 ; v2(4460,3555) 4460,3270 4495,3235 4675,3235 4695,3215 ; v2@4469.96,3554.09 4460,3500 ; v2@4479.67,3551.36 4460,3500 ; J3.2@4671.4,3176.68 4695,3215 ; J3.2@4680.66,3172.34 4695,3215 ; J3.2 4695,3215 ; J3.2@4709.34,3172.34 4695,3215 ; J3.2@4718.6,3176.68 4695,3215
NetL1_1: L1.1 PJ1.2 | length 362.9
  Top Layer w60: L1.1 4040,2568.66 ; 4040,2568.66 PJ1.2 3936.34,2465 4040,2568.66
NetR1_1: R1.1 R2.2 U02.1 | length 906.1
  Top Layer w40: R2.2@4858.61,2849.38 R1.1@4972.99,2743.86 ; R1.1@4961.77,2746.22 4847.01,2851.14 R1.1@4964.77,2751.45 ; R1.1 4847.99,2860 R2.2 ; R2.2 U02.1 4846.85,2860.16 R2.2
OS0: P2.1 U1.3 | length 833.6
  Top Layer w10: U1.3 4716,3831 ; U1.3@4716,3806.24 4716,3831 ; P2.1@4956.32,4079.64 5015,4055 ; P2.1@4960.97,4088.62 5015,4055 ; P2.1 5015,4055 ; P2.1@4981.38,4109.03 5015,4055 ; P2.1@4990.36,4113.68 5015,4055 ; 4716,3831 4723,3838 4795.63,3838 4867.63,3910 4950,3910 5015,3975 5015,4055
OS1: P2.2 U1.4 | length 442.7
  Top Layer w10: U1.4 4696.32,3841.32 ; U1.4@4696.32,3806.24 4696.32,3841.32 ; P2.2 4970,3990 4910,3930 4865,3930 4789,3854 4709,3854 4696.32,3841.32
OS2: P2.3 U1.5 | length 889.6
  Top Layer w10: U1.5 4676.63,3846.63 4700,3870 4775,3870 4855,3950 4895,3950 4920,3975 4920,4040 4870,4090 P2.3 4913.43,4046.57 ; U1.5@4676.63,3806.24 4676.63,3841.74 ; P2.3@4854.03,4081.39 4913.43,4046.57 ; P2.3@4859.76,4089.7 4913.43,4046.57 ; P2.3@4882.18,4107.92 4913.43,4046.57 ; P2.3@4891.48,4111.83 4913.43,4046.57
RESET: P2.10 U1.11 | length 675.8
  Top Layer w10: U1.11 4558.52,3851.15 4565,3857.63 ; U1.11@4558.52,3806.24 4558.52,3841.74 ; v1@4560,3885 4565,3857.63 ; v1@4579.35,3881.46 4565,3857.63 ; 4565,3857.63 v1(4570,3885) 4565,3885 4565,3857.63
  Bottom Layer w10: P2.10@4546,3994.95 4570,3940.47 ; P2.10@4555.58,3998.23 4570,3940.47 ; v1@4560.06,3886.11 4570,3930 v1@4579.94,3886.11 ; v1(4570,3885) P2.10 ; P2.10@4584.42,3998.23 4570,3940.47 ; P2.10@4594,3994.95 4570,3940.47
SCLK: P2.6 U1.12 | length 673.5
  Top Layer w10: U1.12 4538.84,3901.21 4556.63,3919 4734,3919 4770,3955 ; U1.12@4538.84,3806.24 4538.84,3841.74 ; P2.6@4746.4,3993.32 4770,3955 ; P2.6@4755.66,3997.66 4770,3955 ; P2.6@4770,3992.37 4770,3955 ; P2.6 4770,3955 ; P2.6@4784.34,3997.66 4770,3955 ; P2.6@4793.6,3993.32 4770,3955
V1: P3.1 U1.49 | length 1377.8
  Top Layer w10: U1.49 5050.37,3410.1 5072.74,3387.74 5072.74,3322.74 5157.74,3237.74 5157.74,3202.74 5172.74,3187.74 5267.74,3187.74 5297.74,3217.74 ; U1.49@4856.24,3410.1 4891.74,3410.1 ; P3.1@5309.97,3249.64 5272.91,3192.91 ; P3.1@5317.99,3243.51 5272.91,3192.91 ; P3.1@5334.97,3220.14 5272.91,3192.91 ; P3.1@5338.32,3210.61 5272.91,3192.91 ; 5272.91,3192.91 P3.1 ; 5297.74,3217.74 P3.1 ; 5297.74,3217.74 5318.58,3244.01 5297.74,3217.74 ; 5297.74,3217.74 5331.27,3218.64 5297.74,3217.74 ; 5297.74,3217.74 5309.51,3249.14 5297.74,3217.74 ; 5297.74,3217.74 5329.92,3208.31 5297.74,3217.74 ; 5297.74,3217.74 P3.1 ; 5297.74,3217.74 5312.74,3217.74 P3.1
V2: P3.3 U1.51 | length 992.2
  Top Layer w10: U1.51 5071,3449.47 5117.74,3402.74 5117.74,3357.74 5197.74,3277.74 5292.74,3277.74 ; U1.51@4856.24,3449.47 4891.74,3449.47 ; P3.3@5304.94,3341.78 5292.74,3277.74 ; P3.3@5314.69,3339.12 5292.74,3277.74 ; P3.3@5339.05,3323.62 5292.74,3277.74 ; P3.3@5345.58,3315.91 5292.74,3277.74 ; 5292.74,3277.74 P3.3 5327.74,3312.74 5292.74,3277.74
V3: P3.5 U1.53 | length 893.2
  Top Layer w10: U1.53 5091.89,3488.84 5149.74,3430.99 5149.74,3430.74 5197.74,3382.74 5302.74,3382.74 ; U1.53@4856.24,3488.84 4891.74,3488.84 ; P3.5@5303.93,3438.63 5302.74,3382.74 ; P3.5@5314.01,3437.49 5302.74,3382.74 ; P3.5@5339.78,3424.61 5302.74,3382.74 ; P3.5@5346.73,3417.22 5302.74,3382.74 ; 5302.74,3382.74 P3.5 5327.74,3407.74 5302.74,3382.74
V4: P3.7 U1.55 | length 887.7
  Top Layer w10: U1.55 5107.26,3528.21 5152.74,3482.74 5292.74,3482.74 ; U1.55@4856.24,3528.21 4891.74,3528.21 ; P3.7@5305.23,3542.48 5292.74,3482.74 ; P3.7@5314.93,3539.59 5292.74,3482.74 ; P3.7@5338.56,3523.05 5292.74,3482.74 ; P3.7@5344.59,3514.92 5292.74,3482.74 ; 5292.74,3482.74 P3.7 5327.74,3517.74 5292.74,3482.74
V5: P3.9 U1.57 | length 875.2
  Top Layer w10: U1.57 5107.58,3567.58 5122.74,3582.74 5292.74,3582.74 ; U1.57@4856.24,3567.58 4891.74,3567.58 ; P3.9@5305.23,3642.48 5292.74,3582.74 ; P3.9@5314.93,3639.59 5292.74,3582.74 ; P3.9@5338.56,3623.05 5292.74,3582.74 ; P3.9@5344.59,3614.92 5292.74,3582.74 ; 5292.74,3582.74 P3.9 5327.74,3617.74 5292.74,3582.74
V6: P3.11 U1.59 | length 924
  Top Layer w10: U1.59 5086.95,3606.95 5157.74,3677.74 5292.74,3677.74 ; U1.59@4856.24,3606.95 4891.74,3606.95 ; P3.11@5304.94,3741.78 5292.74,3677.74 ; P3.11@5314.69,3739.12 5292.74,3677.74 ; P3.11@5339.05,3723.62 5292.74,3677.74 ; P3.11@5345.58,3715.91 5292.74,3677.74 ; 5292.74,3677.74 P3.11 5327.74,3712.74 5292.74,3677.74
V7: P3.13 U1.61 | length 925.4
  Top Layer w10: U1.61 5061.32,3646.32 5197.74,3782.74 5292.74,3782.74 ; U1.61@4856.24,3646.32 4891.74,3646.32 ; P3.13@5305.23,3842.48 5292.74,3782.74 ; P3.13@5314.93,3839.59 5292.74,3782.74 ; P3.13@5338.56,3823.05 5292.74,3782.74 ; P3.13@5344.59,3814.92 5292.74,3782.74 ; 5292.74,3782.74 P3.13 5327.74,3817.74 5292.74,3782.74
V8: P3.15 U1.63 | length 1001
  Top Layer w10: U1.63 5040.69,3685.69 5072.74,3717.74 5072.74,3767.74 5187.74,3882.74 5292.74,3882.74 ; U1.63@4856.24,3685.69 4891.74,3685.69 ; P3.15@5305.23,3942.48 5292.74,3882.74 ; P3.15@5314.93,3939.59 5292.74,3882.74 ; P3.15@5338.56,3923.05 5292.74,3882.74 ; P3.15@5344.59,3914.92 5292.74,3882.74 ; 5292.74,3882.74 P3.15 5342.74,3932.74 5292.74,3882.74
pads on no net: U02.4

## Polygon pours and split planes (outlines as drawn)
GND on Bottom Layer "Top Layer-No Net 1" (solid, pour order 16): 3850,4170 5095,4170 5080,4155 5080,3875 5080,3865 5015,3800 5025,3790 5025,3735 5010,3735 4990,3715 4980,3725 4770,3725 4770,3395 4775,3390 5030,3390 5030,3345 5131.94,3243.05 5140,3235 5140,3055 5405,3055 5410,3050 5415,3045 5415,2300 3865,2300 3860,2295 3855,2300 3855,4175
AGND on Bottom Layer "Top Layer-No Net 1" (solid, pour order 10): 5100,4165 5100,3870 5045,3815 5045,3810 5045,3745 5025,3725 5015,3715 4780,3715 4780,3400 5030,3400 5030,3390 5060,3360 5065,3355 5065,3315 5065,3310 5115,3260 5145,3230 5145,3195 5145,3065 5160,3050 5410,3050 5410,4160 5405,4165 5100,4165
GND on Top Layer "Top Layer-No Net 1" (solid, pour order 14): 5085,4170 5080,4165 5080,3870 5080,3860 5040,3820 5025,3805 5025,3750 5025,3735 5010,3720 5000,3730 4800,3730 4800,3400 4790,3390 4795,3395 5015,3395 5020,3395 5056.9,3358.1 5060,3355 5060,3305 5075,3305 5140,3240 5140,3055 5140,3050 5145,3045 5150,3040 5415,3040 5415,2300 5410,2295 3860,2295 3860,4170 3865,4175 3870,4170 5085,4170
AGND on Top Layer "Top Layer-No Net 1" (solid, pour order 12): 5100,4160 5405,4160 5410,4165 5415,4160 5415,3050 5155,3050 5145,3060 5145,3220 5065,3300 5065,3310 5065,3350 5025,3390 4805,3390 4800,3395 4790,3405 4790,3715 5010,3715 5015,3720 5045,3750 5045,3815 5040,3820 5090,3870 5100,3870 5100,4160

## Silkscreen, mask and mechanical layers (free items; w line width, h text height)
Top Overlay:
  lines w8: 3970,2315 4065,2315 4065,2515 3970,2515 ; 4077.74,3157.74 4220,3157.74 4220,3957.74 4077.74,3957.74 ; 4077.74,3255 4220,3255 ; 4077.74,3555 4220,3555 ; 4077.74,3655 4220,3655 ; 4077.74,3760 4215,3760 ; 4077.74,3860 4220,3860 ; 4080,3360 4215,3360 ; 4080,3455 4220,3455 ; 4150,3157.74 4150,3957.74 ; 4220,3905 5020,3905 ; 4220,3950 4220,3860 ; 4220,4050 5015,4050 ; 4270,2975 4585,2975 ; 4320,3860 4320,4150 ; 4420,3860 4420,4150 ; 4520,3865 4520,4150 ; 4615,3865 4615,4150 ; 4625,2975 4945,2975 ; 4725,3860 4725,4150 ; 4825,3860 4825,4150 ; 4905,2375 5375,2375 ; 4920,3865 4920,4150 ; 5020,3950 5020,3860 4220,3860 ; 5110,3285 5375,3285 ; 5110,3480 5372.74,3480 ; 5110,3585 5375,3585 ; 5110,3685 5380,3685 ; 5110,3885 5370,3885 ; 5120.94,3182.26 5121.42,3182.26 ; 5177.74,3182.74 5112.74,3182.74 5110,3185.47 5110,3225 5110,3982.74 5177.74,3982.74 ; 5372.74,3380 5110,3380 5030,3380 5030,3780 5110,3780 5377.74,3780 ; 3910,4040 3910,4115 4170,4115 4170,4040 3910,4040 ; 4270,2930 4590,2930 4590,3240 4270,3240 4270,2930 ; 4625,2930 4950,2930 4950,3240 4625,3240 4625,2930 ; 4900,2305 5018.75,2305 5256.25,2305 5375,2305 5375,2450 5370,2455 4900,2455 4900,2305
  text "AD7606" at 3925,4055 h40
  text "CH" at 5110,3995 h30
  text "GND" at 5185,3995 h30
  text "IN" at 5300,3995 h30
  text "V8" at 5130,3955 h30 r270
  text "DB0" at 4100,3950 h30 r270
  text "DB1" at 4170,3945 h30 r270
  text "AGND" at 4235,3920 h20
  text "3.3V" at 4340,3915 h20
  text "5V" at 4455,3915 h20
  text "FSTD" at 4530,3915 h20
  text "CS" at 4650,3915 h20
  text "CONB" at 4735,3915 h20
  text "OS2" at 4845,3915 h20
  text "OS0" at 4940,3915 h20
  text "RST" at 4540,3875 h20
  text "BUSY" at 4635,3875 h20
  text "GND" at 4240,3870 h20
  text "GND" at 4345,3870 h20
  text "GND" at 4445,3870 h20
  text "SCLK" at 4735,3870 h20
  text "CONA" at 4835,3870 h20
  text "OS1" at 4945,3870 h20
  text "V7" at 5125,3855 h30 r270
  text "DB2" at 4100,3850 h30 r270
  text "DB3" at 4170,3850 h30 r270
  text "V6" at 5130,3760 h30 r270
  text "DB4" at 4100,3750 h30 r270
  text "DB5" at 4170,3750 h30 r270
  text "ALL OF GND" at 5055,3745 h35 r270
  text "V5" at 5125,3660 h30 r270
  text "DB6" at 4095,3640 h30 r270
  text "DB7" at 4160,3635 h20 r270
  text "DOA" at 4190,3635 h20 r270
  text "V4" at 5125,3560 h30 r270
  text "DB9" at 4170,3545 h30 r270
  text "DB8" at 4090,3535 h20 r270
  text "DOB" at 4120,3535 h20 r270
  text "V3" at 5125,3460 h30 r270
  text "D10" at 4095,3445 h30 r270
  text "D11" at 4170,3440 h30 r270
  text "V2" at 5125,3360 h30 r270
  text "D12" at 4095,3340 h30 r270
  text "D13" at 4170,3340 h30 r270
  text "V1" at 5125,3255 h30 r270
  text "D14" at 4095,3245 h30 r270
  text "D15" at 4170,3245 h30 r270
  text "Serial" at 4285,2985 h20
  text "Para" at 4480,2985 h20
  text "5V" at 4675,2985 h20
  text "10V" at 4845,2985 h20
  text "Just ch only one" at 4275,2945 h20
  text "Just ch only one" at 4275,2945 h20
  text "The Range" at 4705,2945 h20
  text "5V" at 3995,2500 h45 r270
  text "GND" at 4005,2395 h25 r270
  text "Wei Haochen" at 4925,2390 h40
  text "2017/4/5" at 4955,2325 h25
  text "Delvis" at 5210,2325 h25
Bottom Overlay:
  drawing of 833 lines, arcs and shapes, not listed
Mechanical 1:
  lines w8: 3865,2300 3865,4165
  lines w10: 3784.01,2368.42 3804.01,2308.42 ; 3784.01,4103.42 3804.01,4163.42 ; 3794.01,2308.42 3814.01,2308.42 ; 3794.01,4163.42 3814.01,4163.42 ; 3804.01,2960 3804.01,2308.42 ; 3804.01,3511.83 3804.01,4163.42 ; 3824.01,2368.42 3804.01,2308.42 ; 3824.01,4103.42 3804.01,4163.42 ; 3865,2300 5410,2300 5410,4165 3865,4165 ; 3865,4205 3865,4225 ; 3925,4195 3865,4215 ; 3925,4235 3865,4215 ; 4359.08,4215 3865,4215 ; 4910.92,4215 5405,4215 ; 5345,4195 5405,4215 ; 5345,4235 5405,4215 ; 5405,4205 5405,4225
  text "1540 (mil)" at 4369.08,4179.01 h60
  text "1855 (mil)" at 3840,2970 h60 r90

## Text inside footprints (layer, text, board x,y; h text height)
P1: Top Overlay "2" at 4007.74,4007.74 h20 r270; Top Overlay "1" at 3907.74,4007.74 h20 r270; Top Overlay "15" at 3907.74,3147.74 h20 r270; Top Overlay "16" at 4007.74,3147.74 h20 r270
P2: Top Overlay "2" at 5070,4020 h20 r180; Top Overlay "1" at 5070,4120 h20 r180; Top Overlay "15" at 4210,4120 h20 r180; Top Overlay "16" at 4210,4020 h20 r180
P3: Top Overlay "2" at 5230,3160 h20 r90; Top Overlay "1" at 5350,3160 h20 r90; Top Overlay "15" at 5345,4035 h20 r90; Top Overlay "16" at 5235,4035 h20 r90
U1: Top Overlay "*" at 4780.22,3836.74 h50 r270; Mechanical 1 "*" at 4780.22,3836.74 h50 r270